# EAGLE board cft (EAGLE 5.11)
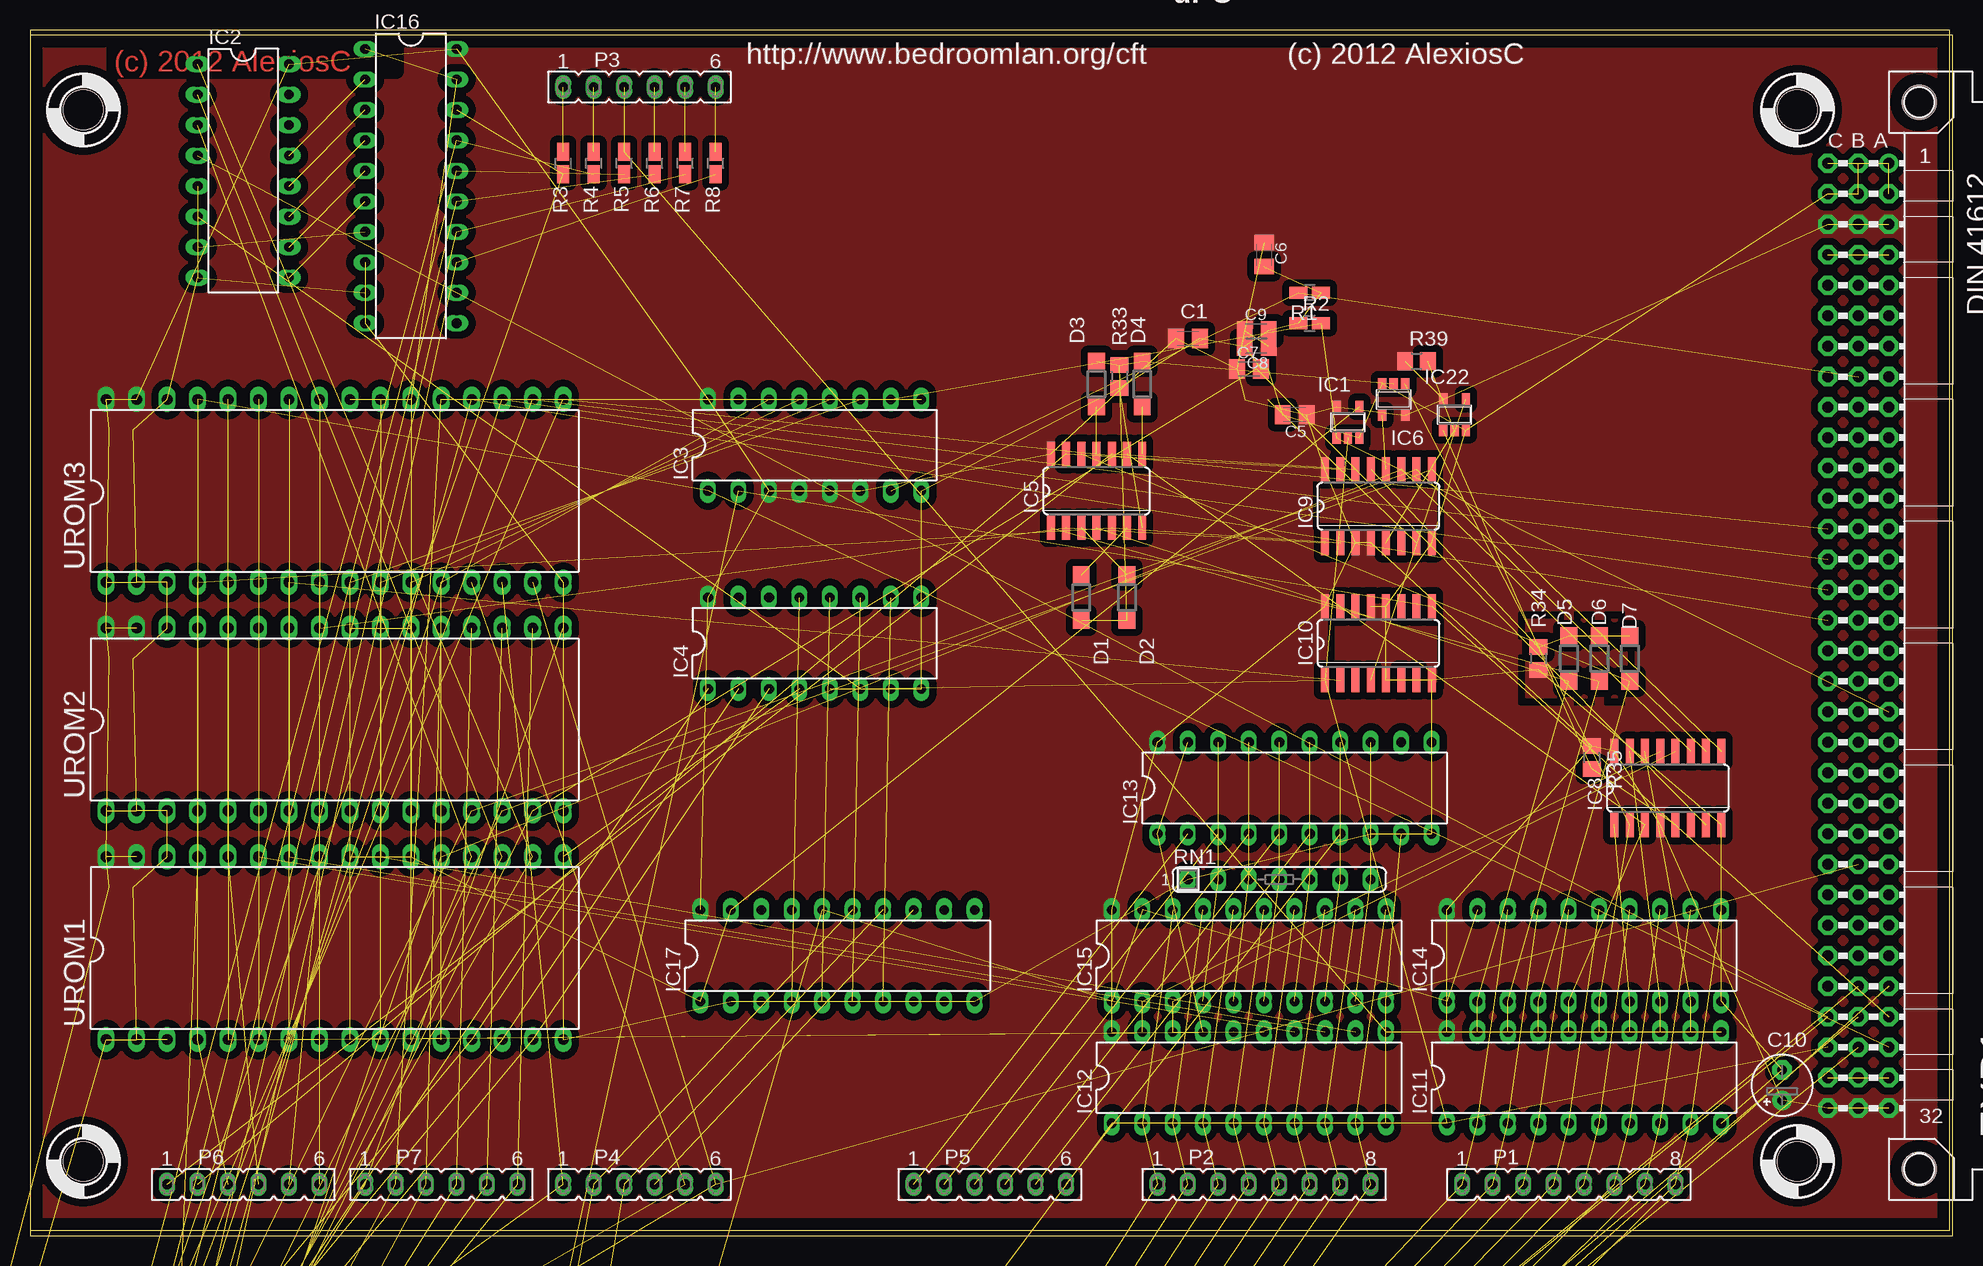
[diagram p0: board, top side]
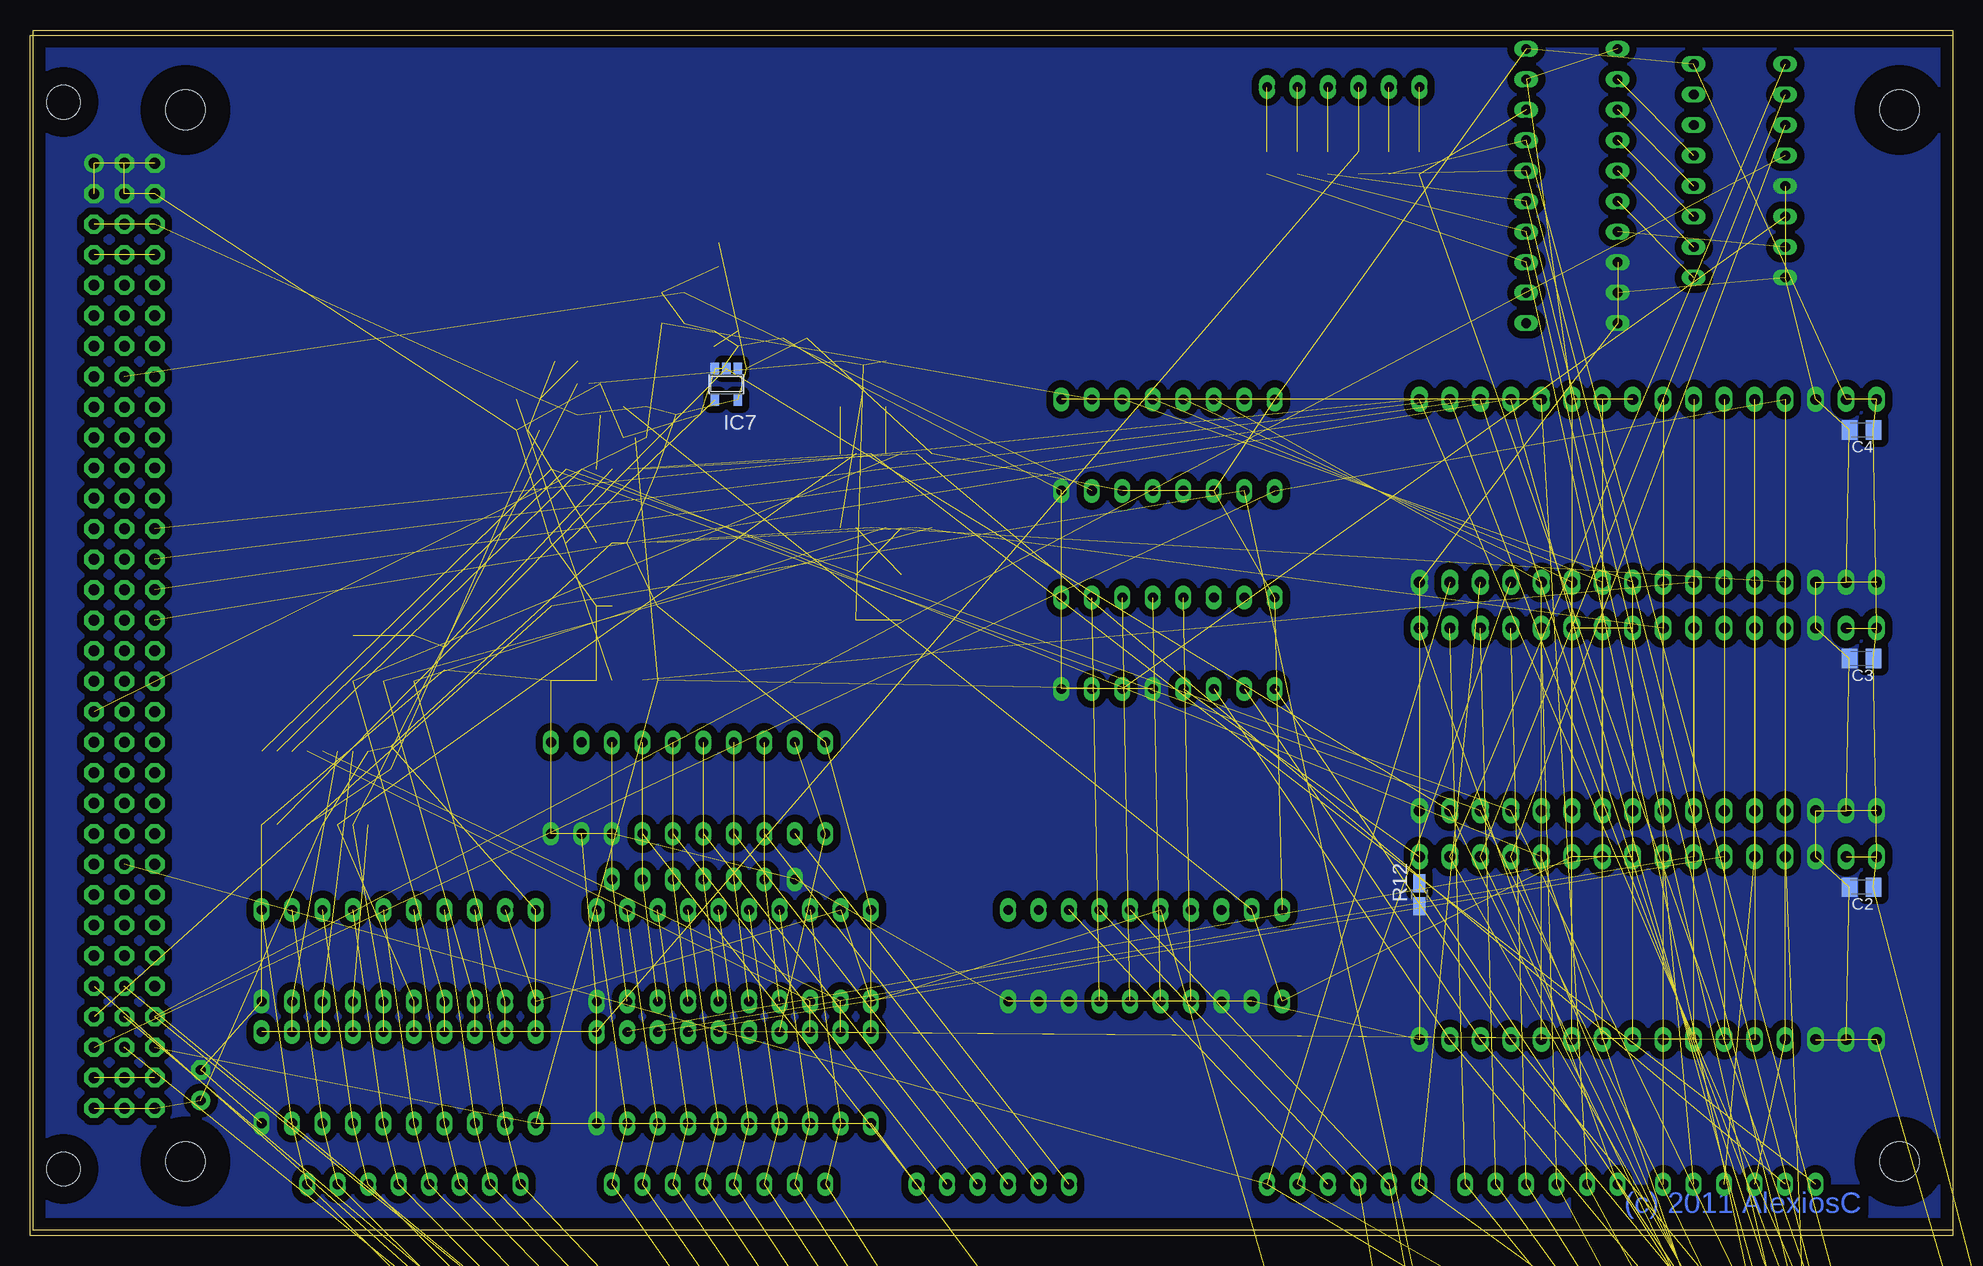
[diagram p1: board, bottom side, seen from below]

Size 160 x 100 mm. Coordinates in mm from the lower left corner, seen from the top.
Outline: 0,0 160,0 160,100 0,100 0,0
Copper layers (1*16): off 0.035mm / dielectric 1.5mm / Bottom 0.035mm
Design rules "cft-olimex-10mil-small-pads-tented-vias": minimum track width 10mil, minimum drill 24mil, track to track 10mil, track to pad 10mil, pad to pad 10mil, via to via 10mil, smd to smd 10mil, copper to edge 40mil, drill to drill 10mil, minimum pad ring 10mil, minimum via ring 12mil, stop-mask expansion 4mil, vias tented up to drill 30mil, thermal gap 10mil
Net classes: 0 default: width 0.305 mm, clearance 0.254 mm; 1 Power: width 0.635 mm, clearance 0.254 mm; 2 12V: width 0.635 mm, clearance 0.635 mm

## Footprints (pad centres in the part's own frame; a part is rotated, then mirrored left to right if it is on the bottom)
C0805K = smd 1.3 x 1.6: 1 -1,0; 2 1,0
E2,5-5 = drill 0.813 pad 1.6 round: + -1.27,0 | drill 0.813 pad 1.6 octagon: - 1.27,0
C0805 = smd 1.3 x 1.5: 1 -0.95,0; 2 0.95,0
C0805' = smd 1.3 x 1.5: 1 -0.85,0; 2 0.85,0
B/3528-21R = smd 1.95 x 2.5: + 1.525,0; - -1.525,0
22-23-2081 = drill 1 long: 1 -8.89,0; 2 -6.35,0; 3 -3.81,0; 4 -1.27,0; 5 1.27,0; 6 3.81,0; 7 6.35,0; 8 8.89,0
SOD123 = smd 1.4 x 1.4: A 1.9,0; C -1.9,0
VG96K = drill 0.914 pad 1.6 round: A1 154.94,39.37 | drill 0.914 pad 1.6 octagon: A2 154.94,36.83; A3 154.94,34.29; A4 154.94,31.75; A5 154.94,29.21; A6 154.94,26.67; A7 154.94,24.13; A8 154.94,21.59; A9 154.94,19.05; A10 154.94,16.51; A11 154.94,13.97; A12 154.94,11.43; A13 154.94,8.89; A14 154.94,6.35; A15 154.94,3.81; A16 154.94,1.27; A17 154.94,-1.27; A18 154.94,-3.81; A19 154.94,-6.35; A20 154.94,-8.89; A21 154.94,-11.43; A22 154.94,-13.97; A23 154.94,-16.51; A24 154.94,-19.05; A25 154.94,-21.59; A26 154.94,-24.13; A27 154.94,-26.67; A28 154.94,-29.21; A29 154.94,-31.75; A30 154.94,-34.29; A31 154.94,-36.83; A32 154.94,-39.37; B1 152.4,39.37; B2 152.4,36.83; B3 152.4,34.29; B4 152.4,31.75; B5 152.4,29.21; B6 152.4,26.67; B7 152.4,24.13; B8 152.4,21.59; B9 152.4,19.05; B10 152.4,16.51; B11 152.4,13.97; B12 152.4,11.43; B13 152.4,8.89; B14 152.4,6.35; B15 152.4,3.81; B16 152.4,1.27; B17 152.4,-1.27; B18 152.4,-3.81; B19 152.4,-6.35; B20 152.4,-8.89; B21 152.4,-11.43; B22 152.4,-13.97; B23 152.4,-16.51; B24 152.4,-19.05; B25 152.4,-21.59; B26 152.4,-24.13; B27 152.4,-26.67; B28 152.4,-29.21; B29 152.4,-31.75; B30 152.4,-34.29; B31 152.4,-36.83; B32 152.4,-39.37; C1 149.86,39.37; C2 149.86,36.83; C3 149.86,34.29; C4 149.86,31.75; C5 149.86,29.21; C6 149.86,26.67; C7 149.86,24.13; C8 149.86,21.59; C9 149.86,19.05; C10 149.86,16.51; C11 149.86,13.97; C12 149.86,11.43; C13 149.86,8.89; C14 149.86,6.35; C15 149.86,3.81; C16 149.86,1.27; C17 149.86,-1.27; C18 149.86,-3.81; C19 149.86,-6.35; C20 149.86,-8.89; C21 149.86,-11.43; C22 149.86,-13.97; C23 149.86,-16.51; C24 149.86,-19.05; C25 149.86,-21.59; C26 149.86,-24.13; C27 149.86,-26.67; C28 149.86,-29.21; C29 149.86,-31.75; C30 149.86,-34.29; C31 149.86,-36.83; C32 149.86,-39.37 | hole 2.794: 157.48,44.45; 157.48,-44.45
STANDOFF_28_60 = hole 3.302: 0,0
SOT23-5 = smd 0.69 x 0.99: 1 -0.95,-1.29; 2 0,-1.29; 3 0.95,-1.29; 4 0.95,1.3; 5 -0.95,1.3
DIL16 = drill 0.813 long: 1 -8.89,-3.81; 2 -6.35,-3.81; 3 -3.81,-3.81; 4 -1.27,-3.81; 5 1.27,-3.81; 6 3.81,-3.81; 7 6.35,-3.81; 8 8.89,-3.81; 9 8.89,3.81; 10 6.35,3.81; 11 3.81,3.81; 12 1.27,3.81; 13 -1.27,3.81; 14 -3.81,3.81; 15 -6.35,3.81; 16 -8.89,3.81
SO14 = smd 0.66 x 2.032: 1 -3.81,-3.073; 2 -2.54,-3.073; 3 -1.27,-3.073; 4 0,-3.073; 5 1.27,-3.073; 6 2.54,-3.073; 7 3.81,-3.073; 8 3.81,3.073; 9 2.54,3.073; 10 1.27,3.073; 11 0,3.073; 12 -1.27,3.073; 13 -2.54,3.073; 14 -3.81,3.073
SO16 = smd 0.66 x 2.032: 1 -4.445,-3.073; 2 -3.175,-3.073; 3 -1.905,-3.073; 4 -0.635,-3.073; 5 0.635,-3.073; 6 1.905,-3.073; 7 3.175,-3.073; 8 4.445,-3.073; 9 4.445,3.073; 10 3.175,3.073; 11 1.905,3.073; 12 0.635,3.073; 13 -0.635,3.073; 14 -1.905,3.073; 15 -3.175,3.073; 16 -4.445,3.073
DIL20 = drill 0.813 long: 1 -11.43,-3.81; 2 -8.89,-3.81; 3 -6.35,-3.81; 4 -3.81,-3.81; 5 -1.27,-3.81; 6 1.27,-3.81; 7 3.81,-3.81; 8 6.35,-3.81; 9 8.89,-3.81; 10 11.43,-3.81; 11 11.43,3.81; 12 8.89,3.81; 13 6.35,3.81; 14 3.81,3.81; 15 1.27,3.81; 16 -1.27,3.81; 17 -3.81,3.81; 18 -6.35,3.81; 19 -8.89,3.81; 20 -11.43,3.81
SO20W = smd 0.66 x 2.032: 1 -5.715,-5.029; 2 -4.445,-5.029; 3 -3.175,-5.029; 4 -1.905,-5.029; 5 -0.635,-5.029; 6 0.635,-5.029; 7 1.905,-5.029; 8 3.175,-5.029; 9 4.445,-5.029; 10 5.715,-5.029; 11 5.715,5.029; 12 4.445,5.029; 13 3.175,5.029; 14 1.905,5.029; 15 0.635,5.029; 16 -0.635,5.029; 17 -1.905,5.029; 18 -3.175,5.029; 19 -4.445,5.029; 20 -5.715,5.029
SO14' = smd 0.6 x 2.2: 1 -3.81,-2.6; 2 -2.54,-2.6; 3 -1.27,-2.6; 4 0,-2.6; 5 1.27,-2.6; 6 2.54,-2.6; 7 3.81,-2.6; 8 3.81,2.6; 9 2.54,2.6; 10 1.27,2.6; 11 0,2.6; 12 -1.27,2.6; 13 -2.54,2.6; 14 -3.81,2.6
JP2 = drill 0.914 long: 1 -2.54,0; 2 0,0; 3 2.54,0
JP5Q = drill 0.914 octagon: 1 -5.08,-1.27; 2 -5.08,1.27; 3 -2.54,-1.27; 4 -2.54,1.27; 5 0,-1.27; 6 0,1.27; 7 2.54,-1.27; 8 2.54,1.27; 9 5.08,-1.27; 10 5.08,1.27
1X02 = drill 1.016 long: 1 -1.27,0; 2 1.27,0
CHIP-LED0805 = smd 1.2 x 1.2: A 0,-1.05; C 0,1.05
FE08 = drill 0.813 long: 1 -8.89,0; 2 -6.35,0; 3 -3.81,0; 4 -1.27,0; 5 1.27,0; 6 3.81,0; 7 6.35,0; 8 8.89,0
FE06 = drill 0.813 long: 1 -6.35,0; 2 -3.81,0; 3 -1.27,0; 4 1.27,0; 5 3.81,0; 6 6.35,0
R0805W = smd 1.5 x 1: 1 -0.94,0; 2 0.94,0
M0805 = smd 1.3 x 1.6: 1 -0.95,0; 2 0.95,0
R0805 = smd 1.3 x 1.5: 1 -0.85,0; 2 0.85,0
CT6 = drill 0.813 octagon: A 2.515,0; E -2.515,0; S 0,-2.54
R0805' = smd 1.3 x 1.5: 1 -0.95,0; 2 0.95,0
SIL7 = drill 0.813 long: 1 -7.62,0; 2 -5.08,0; 3 -2.54,0; 4 0,0; 5 2.54,0; 6 5.08,0; 7 7.62,0
SIL9 = drill 0.813 long: 1 -10.16,0; 2 -7.62,0; 3 -5.08,0; 4 -2.54,0; 5 0,0; 6 2.54,0; 7 5.08,0; 8 7.62,0; 9 10.16,0
SIL4 = drill 0.813 long: 1 -3.81,0; 2 -1.27,0; 3 1.27,0; 4 3.81,0
SIL6 = drill 0.813 long: 1 -6.35,0; 2 -3.81,0; 3 -1.27,0; 4 1.27,0; 5 3.81,0; 6 6.35,0
TACTILE-PTH = drill 1.016 pad 1.88 round: 1 -3.251,2.261; 2 3.251,2.261; 3 -3.251,-2.261; 4 3.251,-2.261
P1-13 = drill 1.321 pad 2.159 octagon: TP 0,0
DIL32 = drill 0.9 long: 1 -19.05,-7.62; 2 -16.51,-7.62; 3 -13.97,-7.62; 4 -11.43,-7.62; 5 -8.89,-7.62; 6 -6.35,-7.62; 7 -3.81,-7.62; 8 -1.27,-7.62; 9 1.27,-7.62; 10 3.81,-7.62; 11 6.35,-7.62; 12 8.89,-7.62; 13 11.43,-7.62; 14 13.97,-7.62; 15 16.51,-7.62; 16 19.05,-7.62; 17 19.05,7.62; 18 16.51,7.62; 19 13.97,7.62; 20 11.43,7.62; 21 8.89,7.62; 22 6.35,7.62; 23 3.81,7.62; 24 1.27,7.62; 25 -1.27,7.62; 26 -3.81,7.62; 27 -6.35,7.62; 28 -8.89,7.62; 29 -11.43,7.62; 30 -13.97,7.62; 31 -16.51,7.62; 32 -19.05,7.62
DIL0814S = drill 0.813 long: 1 -7.62,-3.81; 7 7.62,-3.81; 8 7.62,3.81; 14 -7.62,3.81 | drill 0.8 round: 2 -5.08,-3.81; 3 -2.54,-3.81; 5 2.54,-3.81; 6 5.08,-3.81; 9 5.08,3.81; 10 2.54,3.81; 12 -2.54,3.81; 13 -5.08,3.81 | drill 0.8 long: 4 0,-3.81; 11 0,3.81

## Placement (x,y rotation side)
C1  0.1uF  [C0805K]  96.52,74.3 180 top
C2  1uF  [C0805K]  7.62,28.57 180 bottom
C3  1uF  [C0805K]  7.62,47.62 180 bottom
C4  1uF  [C0805K]  7.62,66.67 180 bottom
C5  0.1uF  [C0805K]  105.41,67.94 180 top
C6  0.1uF  [C0805K]  102.87,81.28 270 top
C7  0.1uF  [C0805K]  101.6,71.75 0 top
C8  0.1uF  [C0805K]  102.23,73.66 180 top
C9  0.1uF  [C0805K]  102.23,74.93 0 top
C10  1uF  [E2,5-5]  146.05,12.06 90 top
C11  0.1uF  [C0805]  24.77,-102.87 0 top  (outside the outline)
C12  0.1uF  [C0805]  31.75,-102.87 0 top  (outside the outline)
C13  0.1uF  [C0805]  -10.79,-113.03 0 top  (outside the outline)
C14  0.1uF  [C0805]  -3.81,-113.03 0 top  (outside the outline)
C15  0.1uF  [C0805]  3.17,-113.03 0 top  (outside the outline)
C16  0.1uF  [C0805]  10.16,-113.03 0 top  (outside the outline)
C17  0.1uF  [C0805]  17.14,-113.03 0 top  (outside the outline)
C18  0.1uF  [C0805]  24.13,-113.03 0 top  (outside the outline)
C19  0.1uF  [C0805]  31.11,-113.03 0 top  (outside the outline)
C20  0.1uF  [C0805]  -10.79,-120.02 0 top  (outside the outline)
C21  10nF  [C0805']  13.34,-155.57 0 top  (outside the outline)
C22  0.1uF  [C0805]  20.32,-155.57 0 top  (outside the outline)
C23  0.1uF  [C0805]  -10.79,-165.74 0 top  (outside the outline)
C24  0.1uF  [C0805]  -3.81,-165.74 0 top  (outside the outline)
C25  0.1uF  [C0805]  3.17,-165.74 0 top  (outside the outline)
C26  0.1uF  [C0805]  10.16,-165.74 0 top  (outside the outline)
C27  0.1uF  [C0805]  17.14,-165.74 0 top  (outside the outline)
C28  1uF  [E2,5-5]  3.81,-155.57 0 top  (outside the outline)
C29  10uF  [B/3528-21R]  17.78,-198.75 0 top  (outside the outline)
C30  0.1uF  [C0805]  -2.54,-217.17 0 top  (outside the outline)
C31  0.1uF  [C0805]  4.45,-217.17 0 top  (outside the outline)
C32  0.1uF  [C0805]  11.43,-217.17 0 top  (outside the outline)
C33  10uF  [B/3528-21R]  -10.16,-209.55 0 top  (outside the outline)
C34  0.1uF  [C0805]  18.41,-217.17 0 top  (outside the outline)
C35  0.1uF  [C0805]  -10.79,-224.79 0 top  (outside the outline)
CON1  [22-23-2081]  -1.91,-239.4 0 top  (outside the outline)
D1  1N4148W  [SOD123]  87.63,52.7 90 top
D2  1N4148W  [SOD123]  91.44,52.7 90 top
D3  1N4148W  [SOD123]  88.9,70.48 270 top
D4  1N4148W  [SOD123]  92.71,70.48 270 top
D5  1N4148W  [SOD123]  128.27,47.62 270 top
D6  1N4148W  [SOD123]  130.81,47.62 270 top
D7  1N4148W  [SOD123]  133.35,47.62 270 top
EXP1  [VG96K]  0,49.53 0 top
H1  HOLE  [STANDOFF_28_60]  4.45,93.34 0 top
H2  HOLE  [STANDOFF_28_60]  147.32,93.34 0 top
H3  HOLE  [STANDOFF_28_60]  147.32,5.71 0 top
H4  HOLE  [STANDOFF_28_60]  4.45,5.71 0 top
IC1  74AHC1G08  [SOT23-5]  109.86,67.31 0 top
IC2  74HCT138N  [DIL16]  17.78,88.27 270 top
IC3  74CT161D  [DIL16]  65.41,65.41 0 top
IC4  74HCT138N  [DIL16]  65.41,48.9 0 top
IC5  74AC08D  [SO14]  88.9,61.59 0 top
IC6  'AHC1G86  [SOT23-5]  113.67,69.22 180 top
IC7  74x1G04  [SOT23-5]  102.23,70.48 180 bottom
IC8  74AC251D  [SO16]  136.53,36.83 0 top
IC9  74AC251D  [SO16]  112.39,60.33 0 top
IC10  74AC175D  [SO16]  112.39,48.9 0 top
IC11  74AC574N  [DIL20]  129.54,12.7 0 top
IC12  74AC574N  [DIL20]  101.6,12.7 0 top
IC13  74AC541N  [DIL20]  105.41,36.83 0 top
IC14  74AC541N  [DIL20]  129.54,22.86 0 top
IC15  74AC541N  [DIL20]  101.6,22.86 0 top
IC16  74AC541N  [DIL20]  31.75,87 270 top
IC17  74AC541N  [DIL20]  67.31,22.86 0 top
IC18  74HCT112D  [SO16]  -5.71,-84.45 0 top  (outside the outline)
IC19  74HCT253D  [SO16]  9.53,-84.45 0 top  (outside the outline)
IC20  74HCT112D  [SO16]  24.77,-84.45 0 top  (outside the outline)
IC21  74HCT00D  [SO14]  9.53,-94.61 0 top  (outside the outline)
IC22  74AHC1G08DBV  [SOT23-5]  118.75,67.94 0 top
IC23  74HCT00D  [SO14]  23.5,-94.61 0 top  (outside the outline)
IC24  74HCT00D  [SO14]  -5.71,-104.78 0 top  (outside the outline)
IC25  74HCT253D  [SO16]  -5.71,-94.61 0 top  (outside the outline)
IC26  74HC373DW  [SO20W]  17.14,-69.85 0 top  (outside the outline)
IC27  '1G04  [SOT23-5]  18.41,-104.78 0 top  (outside the outline)
IC28  74HC541DW  [SO20W]  -4.45,-135.25 0 top  (outside the outline)
IC29  74HC541DW  [SO20W]  12.06,-135.25 0 top  (outside the outline)
IC30  74LS05D  [SO14]  6.99,-147.32 0 top  (outside the outline)
IC31  '1G14  [SOT23-5]  -10.16,-157.48 0 top  (outside the outline)
IC32  74AC590D  [SO16]  -5.71,-147.32 0 top  (outside the outline)
IC33  '1G04  [SOT23-5]  -3.17,-157.48 0 top  (outside the outline)
IC34  LM556D  [SO14']  7.62,-200.66 0 top  (outside the outline)
IC35  74HCT138D  [SO16]  10.79,-187.32 0 top  (outside the outline)
IC36  74HCT32D  [SO14]  -5.71,-200.03 0 top  (outside the outline)
J1  [JP2]  -2.54,-209.55 0 top  (outside the outline)
J2  [JP2]  5.71,-209.55 0 top  (outside the outline)
J3  [JP2]  13.97,-209.55 0 top  (outside the outline)
J4  [JP2]  -9.53,-217.81 0 top  (outside the outline)
JP1  [JP5Q]  8.26,-104.78 0 top  (outside the outline)
JP2  [1X02]  -10.16,-180.34 0 top  (outside the outline)
LED1  [CHIP-LED0805]  35.56,-120.65 0 top  (outside the outline)
LED2  [CHIP-LED0805]  22.23,-173.35 0 top  (outside the outline)
P1  [FE08]  128.27,3.81 0 top
P2  [FE08]  102.87,3.81 0 top
P3  [FE06]  50.8,95.25 0 top
P4  [FE06]  50.8,3.81 0 top
P5  [FE06]  80.01,3.81 0 top
P6  [FE06]  17.78,3.81 0 top
P7  [FE06]  34.29,3.81 0 top
R1  2k2  [R0805W]  106.68,78.11 180 top
R2  2k2  [R0805W]  106.68,75.56 0 top
R3  47R  [R0805W]  44.45,88.9 90 top
R4  47R  [R0805W]  46.99,88.9 90 top
R5  47R  [R0805W]  49.53,88.9 90 top
R6  47R  [R0805W]  52.07,88.9 90 top
R7  47R  [R0805W]  54.61,88.9 90 top
R8  47R  [R0805W]  57.15,88.9 90 top
R9  2K2  [M0805]  3.17,-120.02 0 top  (outside the outline)
R10  2K2  [R0805]  9.53,-120.02 0 top  (outside the outline)
R11  150R  [R0805]  -3.81,-120.02 0 top  (outside the outline)
R12  2k2  [R0805W]  44.45,27.94 90 bottom
R13  2K2  [M0805]  15.88,-120.02 0 top  (outside the outline)
R14  2K2  [M0805]  22.23,-120.02 0 top  (outside the outline)
R15  2K2  [M0805]  28.57,-120.02 0 top  (outside the outline)
R16  150R  [R0805]  -10.79,-172.72 0 top  (outside the outline)
R17  2K2  [R0805]  -3.81,-172.72 0 top  (outside the outline)
R18  50k  [R0805]  2.54,-172.72 0 top  (outside the outline)
R19  2K2  [R0805]  8.89,-172.72 0 top  (outside the outline)
R20  2K2  [R0805]  15.24,-172.72 0 top  (outside the outline)
R21  100R  [R0805]  -3.81,-224.79 0 top  (outside the outline)
R22  470  [R0805]  3.17,-224.79 0 top  (outside the outline)
R23  4k7  [R0805]  9.53,-224.79 0 top  (outside the outline)
R24  470R  [CT6]  -9.53,-187.96 0 top  (outside the outline)
R25  4k7  [CT6]  -1.27,-187.96 0 top  (outside the outline)
R26  1k  [R0805]  15.88,-224.79 0 top  (outside the outline)
R33  2k2  [R0805']  90.81,71.12 270 top
R34  2k2  [R0805']  125.73,47.62 270 top
R35  2k2  [R0805']  130.18,39.37 270 top
R39  2k2  [R0805']  115.57,72.39 0 top
RN1  2k2  [SIL7]  104.14,29.21 0 top
RN3  2k2  [SIL9]  1.27,-31.11 0 top  (outside the outline)
RN4  [SIL4]  -6.35,-56.52 0 top  (outside the outline)
RN5  [SIL7]  -3.17,-61.59 0 top  (outside the outline)
RN8  2k2  [SIL9]  1.27,-36.2 0 top  (outside the outline)
RN10  2k2  [SIL6]  -3.17,-51.44 0 top  (outside the outline)
S1  [TACTILE-PTH]  17.14,-147.96 0 top  (outside the outline)
TP1  TPSPAD1-13  [P1-13]  20.95,-224.79 0 top  (outside the outline)
TP2  TPSPAD1-13  [P1-13]  -11.43,-231.78 0 top  (outside the outline)
TP3  TPSPAD1-13  [P1-13]  -11.43,-127 0 top  (outside the outline)
TP4  TPSPAD1-13  [P1-13]  -6.35,-127 0 top  (outside the outline)
TP5  TPSPAD1-13  [P1-13]  -1.27,-127 0 top  (outside the outline)
TP6  TPSPAD1-13  [P1-13]  3.81,-127 0 top  (outside the outline)
TP7  TPSPAD1-13  [P1-13]  8.89,-127 0 top  (outside the outline)
TP8  TPSPAD1-13  [P1-13]  13.97,-127 0 top  (outside the outline)
TP9  TPPAD1-13  [P1-13]  -5.08,-179.71 0 top  (outside the outline)
U$1  SIGNATURESILK  [SIGNATURE]  144.15,102.87 0 top
UROM1  29F040  [DIL32]  25.4,23.5 0 top
UROM2  29F040  [DIL32]  25.4,42.55 0 top
UROM3  29F040  [DIL32]  25.4,61.59 0 top
XTAL1  16.000MHz  [DIL0814S]  -2.54,-72.39 0 top  (outside the outline)

## Library data of the parts
C1-C20 C22-C35 R33-R35 R39 = rcl
C21 R1-R23 R26 = resistor
CON1 = con-molex; MF: MOLEX; MPN: 22-23-2081; OC_FARNELL: 1756826; OC_NEWARK: 01C7592
D1-D7 = diode
EXP1 = alexios-19inch
H1-H4 U$1 UROM1-UROM3 XTAL1 = alexios
IC1 IC6 IC7 IC22 IC27 IC31 IC33 = 74xx-little-de
IC2 IC4 IC5 IC8-IC21 IC23-IC26 IC28 IC29 IC32 IC35 IC36 = 74xx-eu
IC3 = 41xx
IC30 = 74xx-us
IC34 = linear
J1-J4 JP1 = jumper
JP2 = pinhead
LED1 LED2 = led
P1-P7 = con-lsta; OC_FARNELL: unknown; OC_NEWARK: unknown
R24 R25 = pot
RN1 RN3-RN5 RN8 RN10 = resistor-sil; OC_FARNELL: unknown; OC_NEWARK: unknown
S1 = SparkFun
TP1-TP9 = testpad

## Nets
!CLI: P7.3 RN10.6 UROM2.21
!CLK: IC18.6 IC19.12 IC19.13
!CLL: P7.5 RN10.4 UROM2.19
!CLOCK: IC19.9 IC20.13
!CPL: P7.6 RN10.3 UROM2.18
!END: IC3.9 P7.2 RN3.9 UROM3.21
!GUARD: EXP1.A28 IC36.1 IC36.4 IC36.9 IC36.12 JP1.1 JP1.3 JP1.5 JP1.7 JP1.9 TP8.TP
!HALT: EXP1.A19 IC1.1 IC3.10 R2.2
!INCAC: P7.1 RN10.2 UROM2.17
!INCDR: P4.1 RN3.3 UROM3.14
!INCPC: P4.5 RN3.2 UROM3.13
!IO: EXP1.C14 RN3.6 UROM3.18
!IRQ0: EXP1.C18
!IRQ1: EXP1.C19
!IRQ2: EXP1.C20
!IRQ3: EXP1.A13
!IRQ4: EXP1.A14
!IRQ5: EXP1.A15
!IRQ6: EXP1.A16
!IRQ7: EXP1.A18
!IRQS: P6.4 UROM1.28 UROM2.28 UROM3.28
!MEM: EXP1.C13 RN3.5 UROM3.17
!OPIF3: IC7.4 IC9.7
!R: EXP1.C15 RN3.7 UROM3.19
!RA: J4.2
!RAC: IC17.13 P4.4
!RAGL: IC14.1 IC14.19 IC15.1 IC15.19 IC17.16 J1.2
!RDR: IC17.14 J3.2 P4.3
!RESET: EXP1.C30 IC1.2 IC2.6 IC4.6 IC10.1 IC11.1 IC12.1 IC18.15 IC20.14 IC20.15 IC30.2 IC30.6 IC30.8 IC32.10 IC35.6 R9.1
!RESET-IN: CON1.4 IC30.1 R20.1
!RPC: IC17.15 J2.2 P4.2
!RSTHOLD: EXP1.A30 IC3.1 IC28.1 IC28.19 IC29.1 IC29.19 IC32.12 IC33.4 TP9.TP UROM1.29 UROM2.29 UROM3.29
!SKIP: IC10.2 UROM1.7 UROM2.7 UROM3.7
!STI: P7.4 RN10.5 UROM2.20
!SYSDEV: EXP1.B27
!UCE: IC1.4 IC16.1 IC16.19 IC17.1 IC17.19 UROM1.22 UROM1.24 UROM2.22 UROM2.24 UROM3.22 UROM3.24
!W: EXP1.C16 RN3.8 UROM3.20
!WAC: P3.5 R7.2
!WALU: P3.6 R8.2
!WAR: P3.1 R3.2
!WDR: P3.4 R6.2
!WIR: IC11.11 IC12.11 P3.3 R5.2
!WPC: P3.2 R4.2
!WS: EXP1.B8 IC3.7 R1.2
*TPA: EXP1.A17
*TPC: EXP1.C17
+3.3V: EXP1.A4 EXP1.B4 EXP1.C4
+12V [12V]: EXP1.A31 EXP1.B31 EXP1.C31
AB0: EXP1.A5
AB1: EXP1.A6
AB2: EXP1.A7
AB3: EXP1.A8
AB4: EXP1.A9
AB5: EXP1.A10
AB6: EXP1.A11
AB7: EXP1.A12
AB8: EXP1.A20
AB9: EXP1.A21
AB10: EXP1.A22
AB11: EXP1.A23
AB12: EXP1.A24
AB13: EXP1.A25
AB14: EXP1.A26
AB15: EXP1.A27
AEXT0: EXP1.B13
AEXT1: EXP1.B14
AEXT2: EXP1.B15
AEXT3: EXP1.B16
AEXT4: EXP1.B17
AEXT5: EXP1.B18
AEXT6: EXP1.B19
AEXT7: EXP1.B20
AINDEX: P6.6 UROM1.8 UROM2.8 UROM3.8
CLK: IC18.5 IC19.3 IC19.4 IC32.11 IC32.13
CLK1: EXP1.A29 IC3.2 IC10.9 IC20.6 TP4.TP
CLK2: EXP1.B29 IC20.7 IC21.1 TP6.TP
CLK3: EXP1.B30 IC20.5 IC21.2 IC21.4 TP3.TP
CLK4: EXP1.B28 IC20.9 IC21.5 TP5.TP
CLK5: EXP1.C29 IC2.4 IC21.3 TP7.TP
CLKEN: IC19.2 IC27.2 R11.2 R13.1
CLOCK: IC19.7 IC20.1
DB0: EXP1.C5
DB1: EXP1.C6
DB2: EXP1.C7
DB3: EXP1.C8
DB4: EXP1.C9
DB5: EXP1.C10
DB6: EXP1.C11
DB7: EXP1.C12
DB8: EXP1.C21
DB9: EXP1.C22
DB10: EXP1.C23
DB11: EXP1.C24
DB12: EXP1.C25
DB13: EXP1.C26
DB14: EXP1.C27
DB15: EXP1.C28
FASTCLK: IC25.4 XTAL1.8 XTAL1.11
FL: IC5.2 IC9.1 P6.5 UROM1.25 UROM2.25 UROM3.25
FNEG: IC5.10 IC9.14 P6.1
FPFAST: CON1.1 IC26.3 R14.1
FPSLOW: CON1.2 IC26.4 R15.1
FPUSTEP: CON1.3 IC19.14 R10.2
FV: IC5.5 IC9.2 P6.3 UROM1.4 UROM2.4 UROM3.4
FZERO: IC5.13 IC9.15 P6.2
GND [Power]: C1.1 C2.2 C3.2 C4.2 C5.2 C6.2 C7.2 C8.2 C9.2 C10.- C11.2 C12.1 C13.1 C14.1 C15.1 C16.1 C17.1 C18.1 C19.1 C20.1 C21.2 C22.1 C23.1 C24.1 C25.1 C26.1 C27.1 C28.- C29.- C30.1 C31.1 C32.1 C33.- C34.1 C35.1 EXP1.A1 EXP1.A2 EXP1.B1 EXP1.B2 EXP1.C1 EXP1.C2 IC1.3 IC2.5 IC2.8 IC3.8 IC4.5 IC4.8 IC5.7 IC6.3 IC7.3 IC8.8 IC9.8 IC10.5 IC10.8 IC10.12 IC10.13 IC11.10 IC12.10 IC13.8 IC13.9 IC13.10 IC14.10 IC15.10 IC16.8 IC16.9 IC16.10 IC17.2 IC17.3 IC17.8 IC17.9 IC17.10 IC18.8 IC18.10 IC18.11 IC18.12 IC18.13 IC18.14 IC19.1 IC19.6 IC19.8 IC19.11 IC19.15 IC20.8 IC21.7 IC22.3 IC23.7 IC23.9 IC23.10 IC24.7 IC25.1 IC25.3 IC25.8 IC25.10 IC25.11 IC25.12 IC25.13 IC25.15 IC26.1 IC26.7 IC26.8 IC26.10 IC26.13 IC26.14 IC26.17 IC26.18 IC27.3 IC28.2 IC28.3 IC28.4 IC28.5 IC28.10 IC29.10 IC30.7 IC31.3 IC32.8 IC33.3 IC34.7 IC35.4 IC35.8 IC36.7 JP2.1 LED1.C LED2.C R1.1 R2.1 R10.1 R12.1 R33.2 R34.2 RN1.1 RN8.1 RN10.1 S1.1 S1.2 UROM1.1 UROM1.2 UROM1.3 UROM1.16 UROM1.30 UROM2.1 UROM2.2 UROM2.3 UROM2.16 UROM2.30 UROM3.1 UROM3.2 UROM3.3 UROM3.16 UROM3.30 XTAL1.4 XTAL1.7
IBUS0: IC11.2 IC14.18 IC28.18 P1.1
IBUS1: IC11.3 IC14.17 IC28.17 P1.2
IBUS2: IC11.4 IC14.16 IC28.16 P1.3
IBUS3: IC11.5 IC14.15 IC28.15 P1.4
IBUS4: IC11.6 IC14.14 IC28.14 P1.5
IBUS5: IC11.7 IC14.13 IC28.13 P1.6
IBUS6: IC11.8 IC14.12 IC28.12 P1.7
IBUS7: IC11.9 IC14.11 IC28.11 P1.8
IBUS8: IC12.2 IC15.18 IC29.18 P2.1
IBUS9: IC12.3 IC15.17 IC29.17 P2.2
IBUS10: IC12.4 IC15.16 IC29.16 P2.3
IBUS11: IC12.5 IC15.15 IC29.15 P2.4
IBUS12: IC12.6 IC15.14 IC29.14 P2.5
IBUS13: IC12.7 IC15.13 IC29.13 P2.6
IBUS14: IC12.8 IC15.12 IC29.12 P2.7
IBUS15: IC12.9 IC15.11 IC29.11 P2.8
IR0: D5.A IC5.4 IC11.19 IC14.2
IR1: D6.A IC5.1 IC11.18 IC14.3
IR2: D7.A IC5.12 IC11.17 IC14.4
IR3: IC5.9 IC8.3 IC11.16 IC14.5
IR4: IC6.1 IC8.2 IC11.15 IC14.6
IR5: IC8.1 IC11.14 IC14.7
IR6: IC8.15 IC11.13 IC14.8
IR7: IC8.14 IC11.12 IC14.9
IR8: IC8.13 IC12.19 IC15.2
IR9: IC8.12 IC12.18 IC15.3
IR10: IC12.17 IC13.1 IC13.19
IR11: IC12.16 UROM1.6 UROM2.6 UROM3.6
IR12: IC12.15 UROM1.5 UROM2.5 UROM3.5
IR13: IC12.14 UROM1.27 UROM2.27 UROM3.27
IR14: IC12.13 UROM1.26 UROM2.26 UROM3.26
IR15: IC12.12 UROM1.23 UROM2.23 UROM3.23
N$1: IC16.18 R3.1 RN5.2
N$2: IC16.17 R4.1 RN5.3
N$3: EXP1.B12
N$4: EXP1.B11
N$5: EXP1.B10
N$6: EXP1.B9
N$7: IC2.13 IC16.2
N$8: IC2.12 IC16.3
N$9: IC2.11 IC16.4
N$10: IC2.10 IC16.5
N$11: IC2.9 IC16.6
N$12: IC2.7 IC16.7
N$13: IC16.16 R5.1 RN5.4
N$14: IC16.15 R6.1 RN5.5
N$15: IC16.14 R7.1 RN5.6
N$16: IC16.13 R8.1 RN5.7
N$17: IC23.1 IC23.2 IC23.6 JP1.6
N$18: IC23.3 IC23.12 IC23.13
N$19: IC4.13 IC17.4
N$20: IC4.12 IC17.5
N$21: IC4.11 IC17.6
N$22: IC4.10 IC17.7
N$23: IC23.11 IC24.12 IC24.13 JP1.8
N$24: IC24.1 IC24.2 IC24.11
N$25: IC24.3 IC24.4 IC24.5 JP1.4
N$26: IC24.6 IC24.9 IC24.10
N$27: IC21.6 IC21.9 IC21.10
N$28: IC21.8 IC21.12 IC21.13 JP1.10
N$29: IC21.11 IC23.4 IC23.5
N$30: IC24.8 JP1.2
N$31: IC30.4 IC30.5 R17.1
N$32: IC30.9 IC31.4 R19.1
N$33: C21.1 IC31.2 JP2.2 R18.1 S1.3 S1.4
N$34: IC25.14 IC26.2
N$35: IC25.2 IC26.5
N$36: IC32.9 IC33.2
N$37: IC26.11 IC27.4
N$38: IC34.1 R21.2 R22.1
N$39: IC34.13 R23.1 R26.2
N$40: R21.1 R24.A
N$41: R25.A R26.1
N$42: C30.2 IC34.3
N$43: C32.2 IC34.11
N$44: C29.+ IC34.8 IC34.12 R25.S
N$45: C33.+ IC34.2 IC34.6 R24.S
N$46: IC35.13 IC36.2 J1.3
N$47: IC35.12 IC36.5 J2.3
N$48: IC35.11 IC36.10 J3.3
N$49: LED1.A R11.1
N$50: IC35.10 IC36.13 J4.3
N$51: IC36.3 J1.1
N$52: IC36.6 J2.1
N$53: IC36.8 J3.1
N$54: IC36.11 J4.1
N$56: EXP1.B7
N$57: EXP1.B6
N$58: EXP1.B5
N$59: EXP1.B26
N$60: EXP1.B25
N$62: EXP1.B23
N$63: EXP1.B22
N$64: EXP1.B21
N$66: D1.C D2.C D3.C D4.C IC6.2 R33.1
OP1_BRANCH: IC6.4 IC9.12
OP2_ROLL: D5.C D6.C D7.C IC9.13 R34.1
OPIF0: IC8.11 IC9.11 RN8.9 UROM1.21
OPIF1: IC8.10 IC9.10 RN4.2 UROM2.13
OPIF2: IC8.9 IC9.9 RN4.3 UROM2.14
OPIF3: IC7.2 IC8.7 RN4.4 UROM2.15
PAGE0: IC13.18 IC15.4 RN1.2
PAGE1: IC13.17 IC15.5 RN1.3
PAGE2: IC13.16 IC15.6 RN1.4
PAGE3: IC13.15 IC15.7 RN1.5
PAGE4: IC13.14 IC15.8 RN1.6
PAGE5: IC13.13 IC15.9 RN1.7
PC10: IC13.2 P5.1
PC11: IC13.3 P5.2
PC12: IC13.4 P5.3
PC13: IC13.5 P5.4
PC14: IC13.6 P5.5
PC15: IC13.7 P5.6
POWERLED: LED2.A R16.1
POWEROK: IC30.3 R16.2
RAWCLK: IC18.1 IC25.7
RUNIT0: IC4.1 IC35.1 RN8.2 UROM1.13
RUNIT1: IC4.2 IC35.2 RN8.3 UROM1.14
RUNIT2: IC4.3 IC35.3 RN8.4 UROM1.15
RUNIT3: IC4.4 IC35.5 R12.2 RN8.5 UROM1.17
SKIP0: IC10.4 IC22.4
SKIPMUXHI: IC9.5 IC22.2 R39.2
SKIPMUXLO: IC8.5 IC22.1 R35.2
SL: D2.A IC5.3
SLOWCLK: IC25.6 IC34.5 TP1.TP
SN: D4.A IC5.8
SV: D1.A IC5.6
SZ: D3.A IC5.11
TESTCLK: IC25.5 IC34.9 TP2.TP
UINSTR18: EXP1.B24 P4.6 RN3.4 UROM3.15
UPC0: IC3.14 UROM1.12 UROM2.12 UROM3.12
UPC1: IC3.13 UROM1.11 UROM2.11 UROM3.11
UPC2: IC3.12 UROM1.10 UROM2.10 UROM3.10
UPC3: IC3.11 UROM1.9 UROM2.9 UROM3.9
VCC [Power]: C1.2 C2.1 C3.1 C4.1 C5.1 C6.1 C7.1 C8.1 C9.1 C10.+ C11.1 C12.2 C13.2 C14.2 C15.2 C16.2 C17.2 C18.2 C19.2 C20.2 C22.2 C23.2 C24.2 C25.2 C26.2 C27.2 C28.+ C31.2 C34.2 C35.2 EXP1.A3 EXP1.A32 EXP1.B3 EXP1.B32 EXP1.C3 EXP1.C32 IC1.5 IC2.16 IC3.3 IC3.4 IC3.5 IC3.6 IC3.16 IC4.16 IC5.14 IC6.5 IC7.5 IC8.4 IC8.16 IC9.3 IC9.4 IC9.16 IC10.16 IC11.20 IC12.20 IC13.20 IC14.20 IC15.20 IC16.20 IC17.20 IC18.2 IC18.3 IC18.4 IC18.16 IC19.5 IC19.10 IC19.16 IC20.2 IC20.3 IC20.4 IC20.10 IC20.11 IC20.12 IC20.16 IC21.14 IC22.5 IC23.14 IC24.14 IC25.16 IC26.20 IC27.5 IC28.6 IC28.7 IC28.8 IC28.9 IC28.20 IC29.2 IC29.3 IC29.4 IC29.5 IC29.6 IC29.7 IC29.8 IC29.9 IC29.20 IC30.11 IC30.13 IC30.14 IC31.5 IC32.14 IC32.16 IC33.5 IC34.4 IC34.10 IC34.14 IC35.16 IC36.14 R9.2 R13.2 R14.2 R15.2 R17.2 R18.2 R19.2 R20.2 R22.2 R23.2 R35.1 R39.1 RN3.1 RN4.1 RN5.1 UROM1.31 UROM1.32 UROM2.31 UROM2.32 UROM3.31 UROM3.32 XTAL1.14
WUNIT0: IC2.1 RN8.6 UROM1.18
WUNIT1: IC2.2 RN8.7 UROM1.19
WUNIT2: IC2.3 RN8.8 UROM1.20

## Tracks (layer width: path | path; a pad name or v marks a point on that pad's centre or on a via)
!CLI  (2 unrouted)
!CLK  (2 unrouted)
!CLL  (2 unrouted)
!CLOCK  (1 unrouted)
!CPL  (2 unrouted)
!END  (3 unrouted)
!GUARD  (10 unrouted)
!HALT  (3 unrouted)
!INCAC  (2 unrouted)
!INCDR  (2 unrouted)
!INCPC  (2 unrouted)
!IO  (2 unrouted)
!IRQS  (3 unrouted)
!MEM  (2 unrouted)
!OPIF3  (1 unrouted)
!R  (2 unrouted)
!RAC  (1 unrouted)
!RAGL  (5 unrouted)
!RDR  (2 unrouted)
!RESET  (15 unrouted)
!RESET-IN  (2 unrouted)
!RPC  (2 unrouted)
!RSTHOLD  (11 unrouted)
!SKIP  (3 unrouted)
!STI  (2 unrouted)
!UCE  (10 unrouted)
!W  (2 unrouted)
!WAC  (1 unrouted)
!WALU  (1 unrouted)
!WAR  (1 unrouted)
!WDR  (1 unrouted)
!WIR  (3 unrouted)
!WPC  (1 unrouted)
!WS  (2 unrouted)
+3.3V  (2 unrouted)
+12V  (2 unrouted)
AINDEX  (3 unrouted)
CLK  (4 unrouted)
CLK1  (4 unrouted)
CLK2  (3 unrouted)
CLK3  (4 unrouted)
CLK4  (3 unrouted)
CLK5  (3 unrouted)
CLKEN  (3 unrouted)
CLOCK  (1 unrouted)
FASTCLK  (2 unrouted)
FL  (5 unrouted)
FNEG  (2 unrouted)
FPFAST  (2 unrouted)
FPSLOW  (2 unrouted)
FPUSTEP  (2 unrouted)
FV  (5 unrouted)
FZERO  (2 unrouted)
GND  (150 unrouted)
  pour Bottom (isolate 0.61, rank 6, no thermals): 0,99.69 0,0 160.02,0 160.02,99.69
  pour off (isolate 0.61, rank 5, no thermals): 117.16,62.23 117.16,58.42 116.52,58.42 116.52,59.05 107.63,59.05 107.63,62.23
  pour off (isolate 0.61, rank 5, no thermals): 117.16,52.07 117.16,45.72 108.9,45.72 108.9,52.07
  pour off (isolate 0.61, rank 5, no thermals): 133.03,50.8 133.03,44.45 124.78,44.45 124.78,50.8
IBUS0  (3 unrouted)
IBUS1  (3 unrouted)
IBUS2  (3 unrouted)
IBUS3  (3 unrouted)
IBUS4  (3 unrouted)
IBUS5  (3 unrouted)
IBUS6  (3 unrouted)
IBUS7  (3 unrouted)
IBUS8  (3 unrouted)
IBUS9  (3 unrouted)
IBUS10  (3 unrouted)
IBUS11  (3 unrouted)
IBUS12  (3 unrouted)
IBUS13  (3 unrouted)
IBUS14  (3 unrouted)
IBUS15  (3 unrouted)
IR0  (3 unrouted)
IR1  (3 unrouted)
IR2  (3 unrouted)
IR3  (3 unrouted)
IR4  (3 unrouted)
IR5  (2 unrouted)
IR6  (2 unrouted)
IR7  (2 unrouted)
IR8  (2 unrouted)
IR9  (2 unrouted)
IR10  (2 unrouted)
IR11  (3 unrouted)
IR12  (3 unrouted)
IR13  (3 unrouted)
IR14  (3 unrouted)
IR15  (3 unrouted)
N$1  (2 unrouted)
N$2  (2 unrouted)
N$7  (1 unrouted)
N$8  (1 unrouted)
N$9  (1 unrouted)
N$10  (1 unrouted)
N$11  (1 unrouted)
N$12  (1 unrouted)
N$13  (2 unrouted)
N$14  (2 unrouted)
N$15  (2 unrouted)
N$16  (2 unrouted)
N$17  (3 unrouted)
N$18  (2 unrouted)
N$19  (1 unrouted)
N$20  (1 unrouted)
N$21  (1 unrouted)
N$22  (1 unrouted)
N$23  (3 unrouted)
N$24  (2 unrouted)
N$25  (3 unrouted)
N$26  (2 unrouted)
N$27  (2 unrouted)
N$28  (3 unrouted)
N$29  (2 unrouted)
N$30  (1 unrouted)
N$31  (2 unrouted)
N$32  (2 unrouted)
N$33  (5 unrouted)
N$34  (1 unrouted)
N$35  (1 unrouted)
N$36  (1 unrouted)
N$37  (1 unrouted)
N$38  (2 unrouted)
N$39  (2 unrouted)
N$40  (1 unrouted)
N$41  (1 unrouted)
N$42  (1 unrouted)
N$43  (1 unrouted)
N$44  (3 unrouted)
N$45  (3 unrouted)
N$46  (2 unrouted)
N$47  (2 unrouted)
N$48  (2 unrouted)
N$49  (1 unrouted)
N$50  (2 unrouted)
N$51  (1 unrouted)
N$52  (1 unrouted)
N$53  (1 unrouted)
N$54  (1 unrouted)
N$66  (5 unrouted)
OP1_BRANCH  (1 unrouted)
OP2_ROLL  (4 unrouted)
OPIF0  (3 unrouted)
OPIF1  (3 unrouted)
OPIF2  (3 unrouted)
OPIF3  (3 unrouted)
PAGE0  (2 unrouted)
PAGE1  (2 unrouted)
PAGE2  (2 unrouted)
PAGE3  (2 unrouted)
PAGE4  (2 unrouted)
PAGE5  (2 unrouted)
PC10  (1 unrouted)
PC11  (1 unrouted)
PC12  (1 unrouted)
PC13  (1 unrouted)
PC14  (1 unrouted)
PC15  (1 unrouted)
POWERLED  (1 unrouted)
POWEROK  (1 unrouted)
RAWCLK  (1 unrouted)
RUNIT0  (3 unrouted)
RUNIT1  (3 unrouted)
RUNIT2  (3 unrouted)
RUNIT3  (4 unrouted)
SKIP0  (1 unrouted)
SKIPMUXHI  (2 unrouted)
SKIPMUXLO  (2 unrouted)
SL  (1 unrouted)
SLOWCLK  (2 unrouted)
SN  (1 unrouted)
SV  (1 unrouted)
SZ  (1 unrouted)
TESTCLK  (2 unrouted)
UINSTR18  (3 unrouted)
UPC0  (3 unrouted)
UPC1  (3 unrouted)
UPC2  (3 unrouted)
UPC3  (3 unrouted)
VCC  (128 unrouted)
  pour off (isolate 0.61, rank 6, no thermals): 0,99.69 0,0 160.02,0 160.02,99.69
WUNIT0  (2 unrouted)
WUNIT1  (2 unrouted)
WUNIT2  (2 unrouted)

## Text on the board
off: (c) 2012 AlexiosC
Bottom: (c) 2011 AlexiosC
tNames: Microcode v.4 or newer only! | Microcode ROMs | AGL LSB | AGL MSB | IR LSB | Skip/Branch Unit | Write Unit Decoder | IR MSB | uPC | http://www.bedroomlan.org/cft | (c) 2012 AlexiosC | CFT Control Unit Rev F